# EAGLE board InkTime.fbrd (EAGLE 9.7.0)
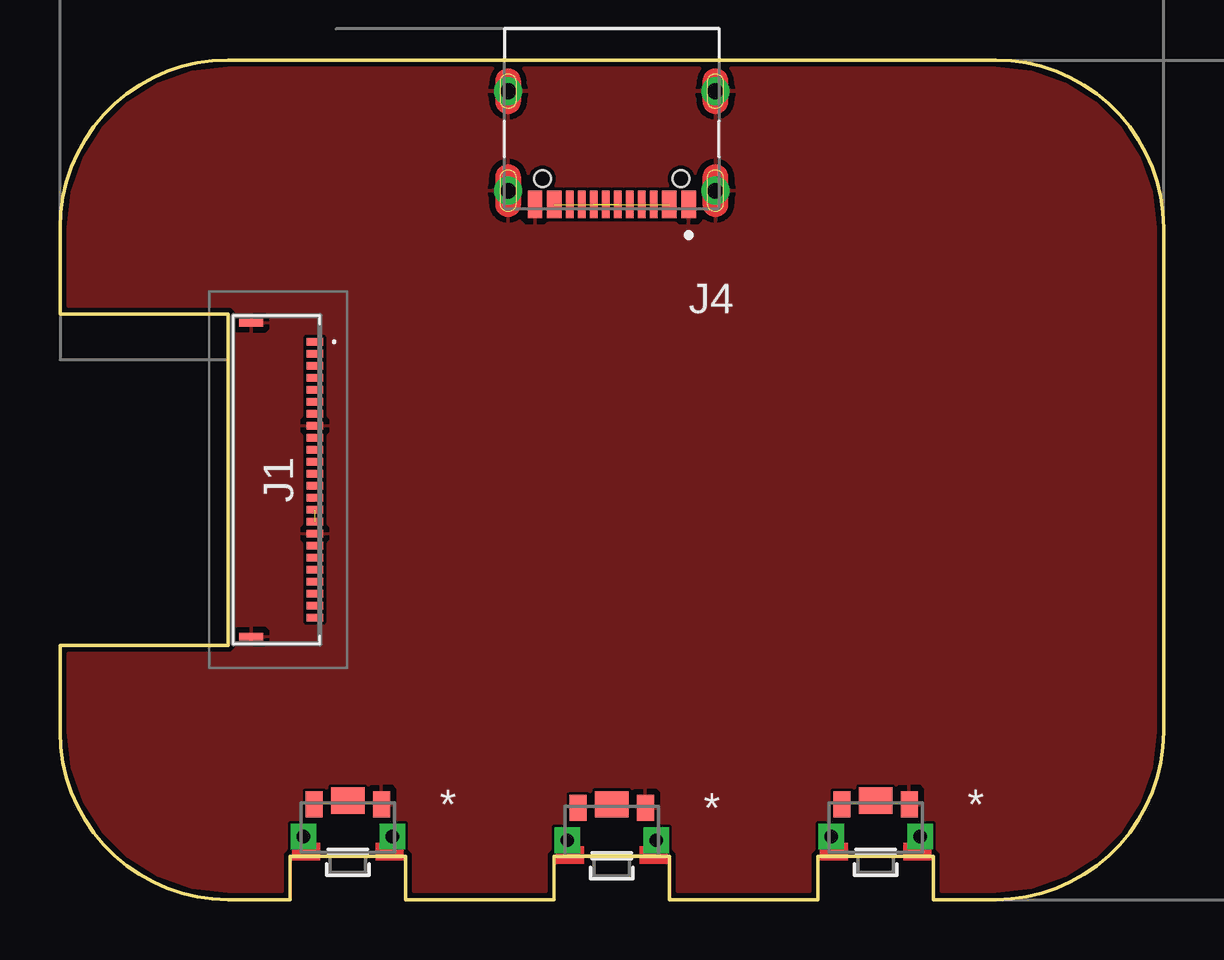
[diagram p0: board, top side]
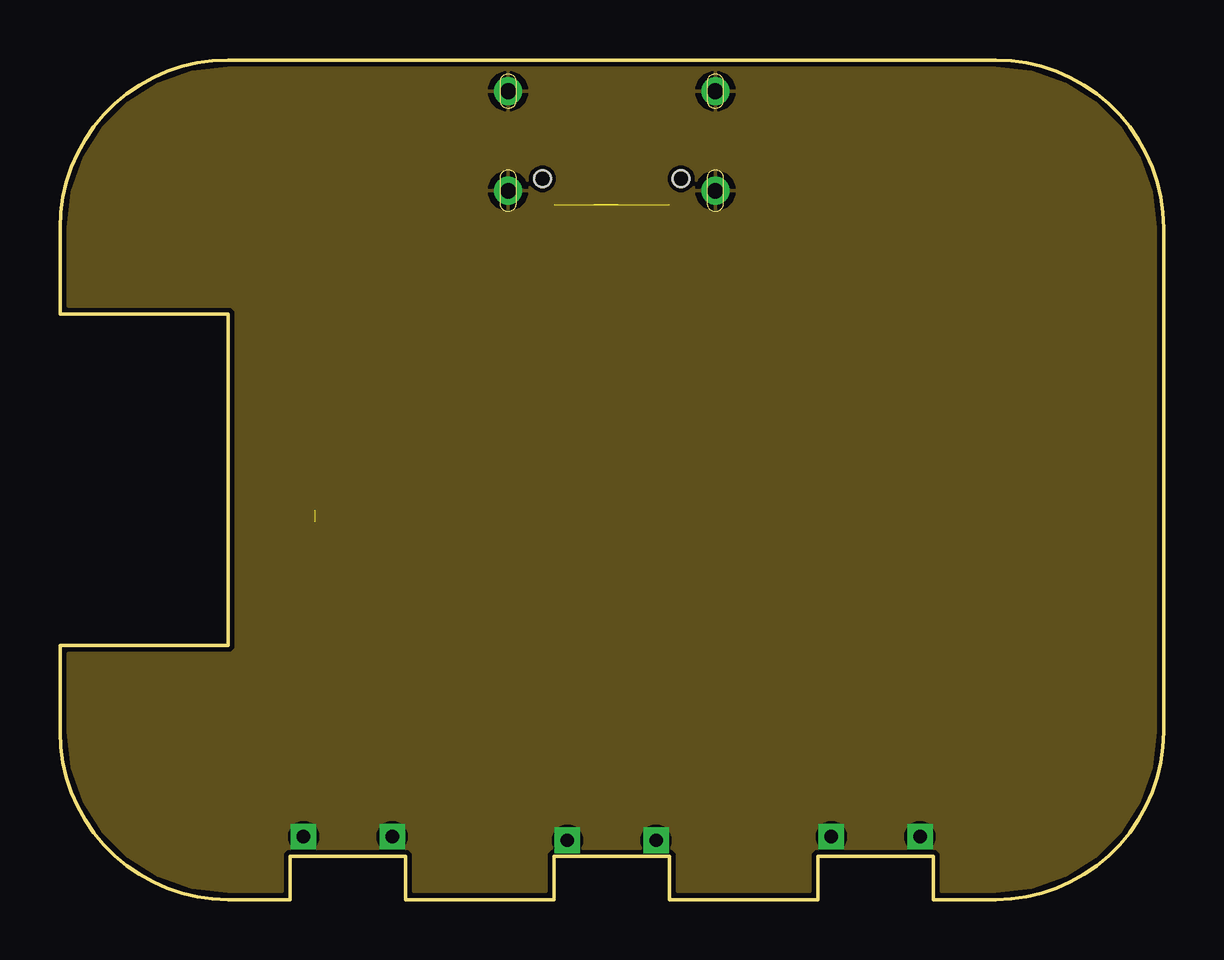
[diagram p1: board, inner layer GND]
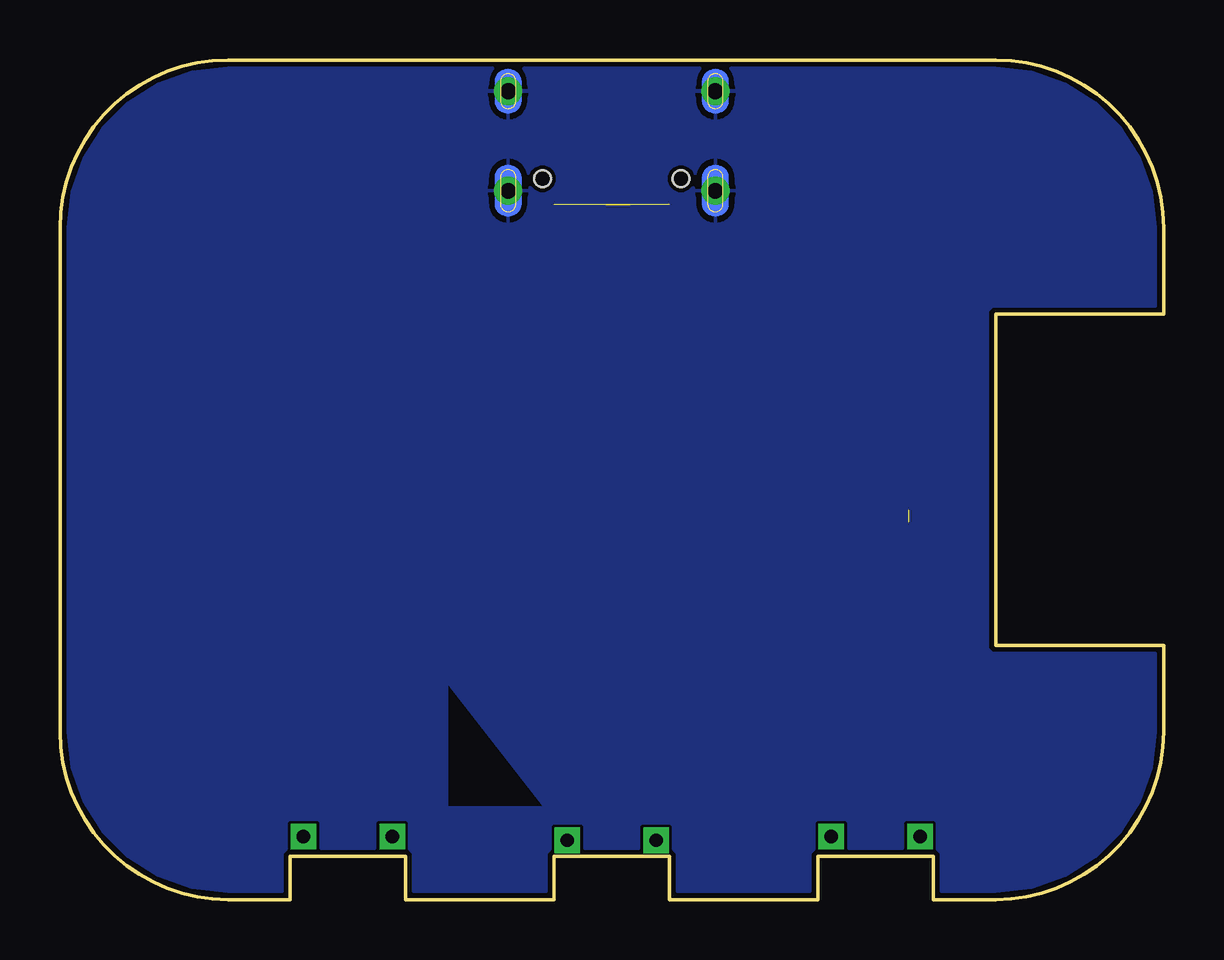
[diagram p2: board, bottom side, seen from below]

Size 46 x 35 mm. Coordinates in mm from the lower left corner, seen from the top.
Outline: 39,0 36.4,0 36.4,1.8 31.6,1.8 31.6,0 25.4,0 25.4,1.8 20.6,1.8 20.6,0 14.4,0 14.4,1.8 9.6,1.8 9.6,0 7,0 arc-90 0,7 0,10.6 7,10.6 7,24.4 0,24.4 0,28 arc-90 7,35 39,35 arc-90 46,28 46,7 arc-90 39,0
Copper layers (1+2*63+16): Top / GND / Bottom / layer 63
Stack-up 4 Layer Stack: Top SilkScreen Epoxy Ink / Top SolderMask User Defined 0.02mm Dk 4.3 / Top Surface Finish Lead-Free 0.02mm / Top User Defined 0.03mm / Dielectric-1 User Defined 0.034mm / Dielectric-2 User Defined 0.034mm / GND User Defined 0.03mm / Dielectric-3 User Defined 0.664mm / Power User Defined 0.03mm / Dielectric-4 User Defined 0.034mm / Dielectric-5 User Defined 0.034mm / Bottom User Defined 0.03mm / Bottom Surface Finish Lead-Free 0.02mm / Bottom SolderMask User Defined 0.02mm Dk 4.3 / Bottom SilkScreen Epoxy Ink
Design rules: minimum copper width 5mil, minimum drill size 0.2mm, copper clearance wire_polygon to wire_polygon 5mil, copper clearance wire_polygon to pad_smd 5mil, copper clearance wire_polygon to via 5mil, copper clearance pad_smd to pad_smd 5mil, copper clearance pad_smd to via 5mil, copper clearance via to via 5mil, copper clearance smd to pad (same net) 5mil, copper clearance smd to via (same net) 5mil, copper clearance smd to smd (same net) 5mil, dimension clearance 0.2mm, via restrict clearance 0mil, restrict clearance 0mil, drill distance 6mil, keepout clearance 0mil

## Footprints (pad centres in the part's own frame; a part is rotated, then mirrored left to right if it is on the bottom)
5034802400 = smd 0.3 x 0.7: 1 -5.75,1.525; 2 -5.25,1.525; 3 -4.75,1.525; 4 -4.25,1.525; 5 -3.75,1.525; 6 -3.25,1.525; 7 -2.75,1.525; 8 -2.25,1.525; 9 -1.75,1.525; 10 -1.25,1.525; 11 -0.75,1.525; 12 -0.25,1.525; 13 0.25,1.525; 14 0.75,1.525; 15 1.25,1.525; 16 1.75,1.525; 17 2.25,1.525; 18 2.75,1.525; 19 3.25,1.525; 20 3.75,1.525; 21 4.25,1.525; 22 4.75,1.525; 23 5.25,1.525; 24 5.75,1.525 | smd 0.3 x 1: MP1 -6.54,-1.125; MP2 6.54,-1.125
KINGHELM_KH-TYPE-C-16P = smd 0.6 x 1.15: A1_B12 -3.2,4.725; A4_B9 -2.4,4.725; A9_B4 2.4,4.725; A12_B1 3.2,4.725 | smd 0.3 x 1.15: A5 -1.25,4.725; A6 -0.25,4.725; A7 0.25,4.725; A8 1.25,4.725; B5 1.75,4.725; B6 0.75,4.725; B7 -0.75,4.725; B8 -1.75,4.725 | drill 0.65 pad 1.05: SH1 -4.32,0; SH2 4.32,0; SH3 -4.32,4.15; SH4 4.32,4.15 | hole 0.7: -2.89,3.65; 2.89,3.65
SW_EVP-AKE31A_PAN = smd 0.711 x 1.092: 1 -1.4,-0.972; 2 1.4,-0.972 | drill 0.559 pad 0.914 square: 3 -1.848,0.381; 4 1.848,0.381 | smd 1.397 x 1.092: 5 0,-1.124

## Placement (x,y rotation side)
J1  503480-2400  [5034802400]  9.1,17.5 270 top
J4  KH-TYPE-C-16P  [KINGHELM_KH-TYPE-C-16P]  23,33.7 180 top
SW2  EVP-AKE31ASW_EVP-AKE31A_PAN  [SW_EVP-AKE31A_PAN]  34,3 180 top
SW3  EVP-AKE31ASW_EVP-AKE31A_PAN  [SW_EVP-AKE31A_PAN]  23,2.85 180 top
SW4  EVP-AKE31ASW_EVP-AKE31A_PAN  [SW_EVP-AKE31A_PAN]  12,3 180 top

## Library data of the parts
J1 = 503480-2400; DESCRIPTION: FFC & FPC Connectors 0.5mm FPC RA SMT Dual Contact 24Ckt; HEIGHT: 1.87mm; MANUFACTURER_NAME: Molex; MANUFACTURER_PART_NUMBER: 503480-2400; MOUSER_PART_NUMBER: 538-503480-2400; MOUSER_PRICE-STOCK: https://www.mouser.co.uk/ProductDetail/Molex/503480-2400?qs=OAhjpuo3Vu7efIoxFh9AOw%3D%3D
J4 = KH-TYPE-C-16P; AVAILABILITY: Not in stock; CHECK_PRICES: https://www.snapeda.com/parts/KH-TYPE-C-16P/Kinghelm/view-part/?ref=eda; MF: kinghelm; MP: KH-TYPE-C-16P; PACKAGE: None; PRICE: None; SNAPEDA_LINK: https://www.snapeda.com/parts/KH-TYPE-C-16P/Kinghelm/view-part/?ref=snap
SW2-SW4 = 2025-10-22_07-23-44_Library; COPYRIGHT: Copyright (C) 2025 Ultra Librarian. All rights reserved.; DIGI-KEY_PART_NUMBER_1: P123437TR-ND; DIGI-KEY_PART_NUMBER_2: P123437CT-ND; DIGI-KEY_PART_NUMBER_3: P123437DKR-ND; MANUFACTURER_NAME: Panasonic; MANUFACTURER_PART_NUMBER: EVP-AKE31A

## Nets
DN: J4.A7 J4.B7
DP: J4.A6 J4.B6
EPD_3V3: J1.15 J1.16
EPD_BUSY: J1.9
EPD_CS: J1.12
EPD_DC: J1.11
EPD_RST: J1.10
GDR: J1.2
GND: J1.8 J1.17 J1.MP1 J1.MP2 J4.A1_B12 J4.A12_B1 J4.SH1 J4.SH2 J4.SH3 J4.SH4 SW2.1 SW3.1 SW4.1
IO/BOOT: SW2.2
IO/CHG1: SW3.2
IO/CHG2: SW4.2
MOSI: J1.14
N$1: J4.B5
N$2: J1.4
N$4: J4.A5
N$5: J1.5
N$6: J1.24
N$7: J1.18
N$9: J1.22
N$16: J1.20
N$18: J1.19
PREVGH: J1.21
PREVGL: J1.23
RESE: J1.3
SCK: J1.13
VBUS [HIGH_CURRENT]: J4.A4_B9 J4.A9_B4

## Tracks (layer width: path | path; a pad name or v marks a point on that pad's centre or on a via)
DN  (1 unrouted)
DP  (1 unrouted)
EPD_3V3  (1 unrouted)
GND
  pour GND: 0,10.6 0,28.1 arc-90 6.9,35 39.3,35 arc-90 46,28.3 46,-0.4 -0.1,-0.4 -0.1,10.6
  pour Top: -1,37.6 43.1,37.6 47.1,33.6 47.1,2.4 41.8,-2.9 1.2,-2.9 -1,-0.7
  pour Bottom: -1,37.6 43.1,37.6 47.1,33.6 47.2,33.6 47.2,-0.9 44.8,-3.3 -2.6,-3.3 -2.8,-3.5 -2.8,35.8
VBUS  (1 unrouted)
(copper drawn outside any net)
  shapes: Bottom area x1